# Altium PCB CROSS-FPGA_OBNINSK.PcbDoc
Units mm, origin at the board's own origin, x right, y up, seen from the top; angles counter-clockwise.
Board outline 71.12 x 31.75 mm, 2 copper layers (Top Layer, Top, Bottom Layer, Bottom); 1 components, 31 nets, 116 pads, 15 vias.
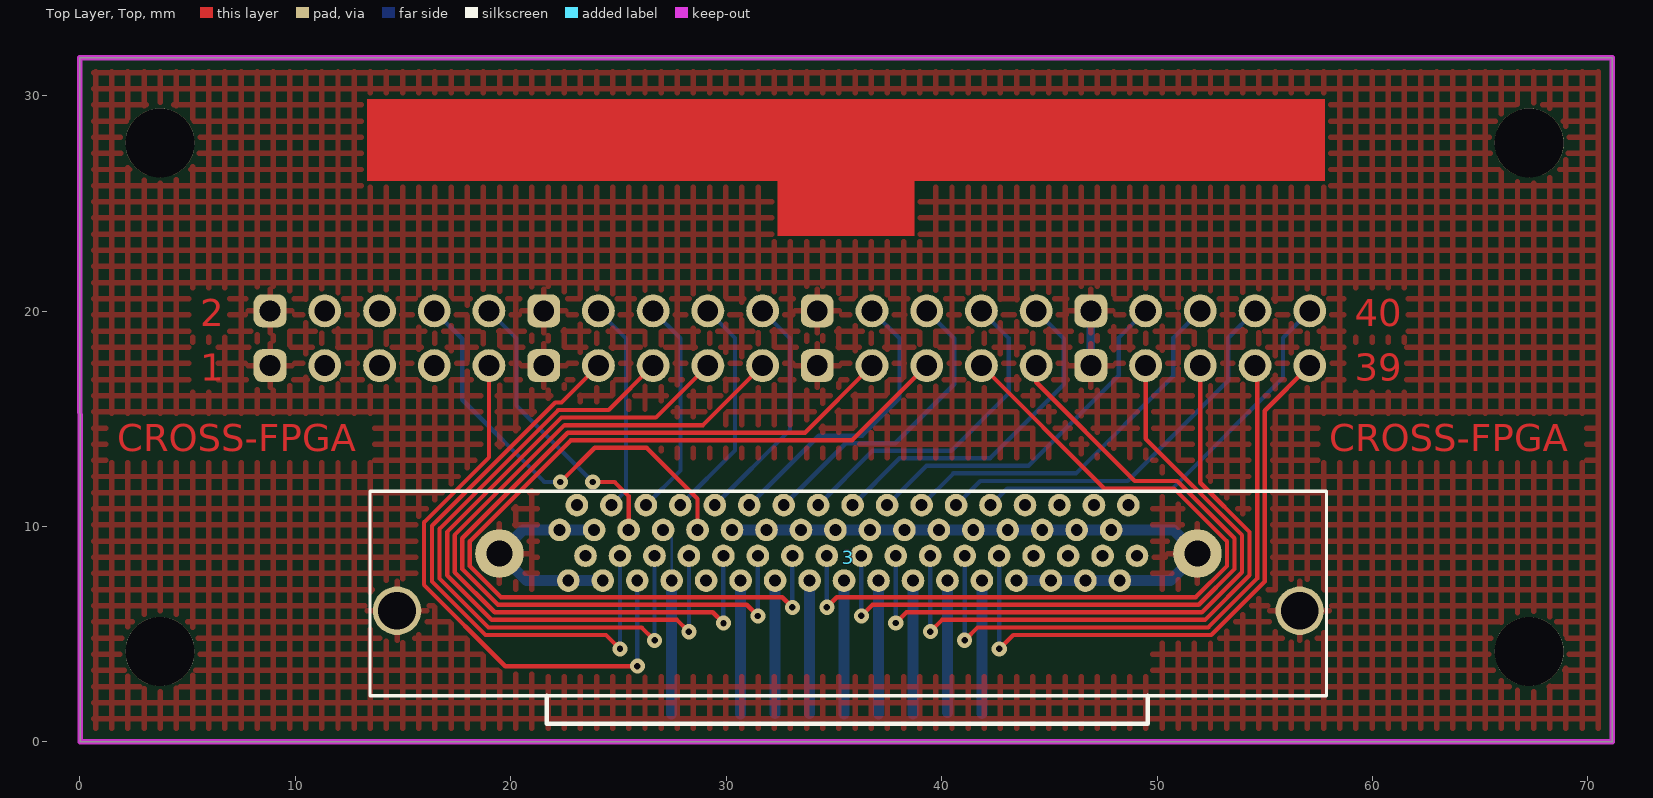
[diagram p0: Top Layer, Top view]
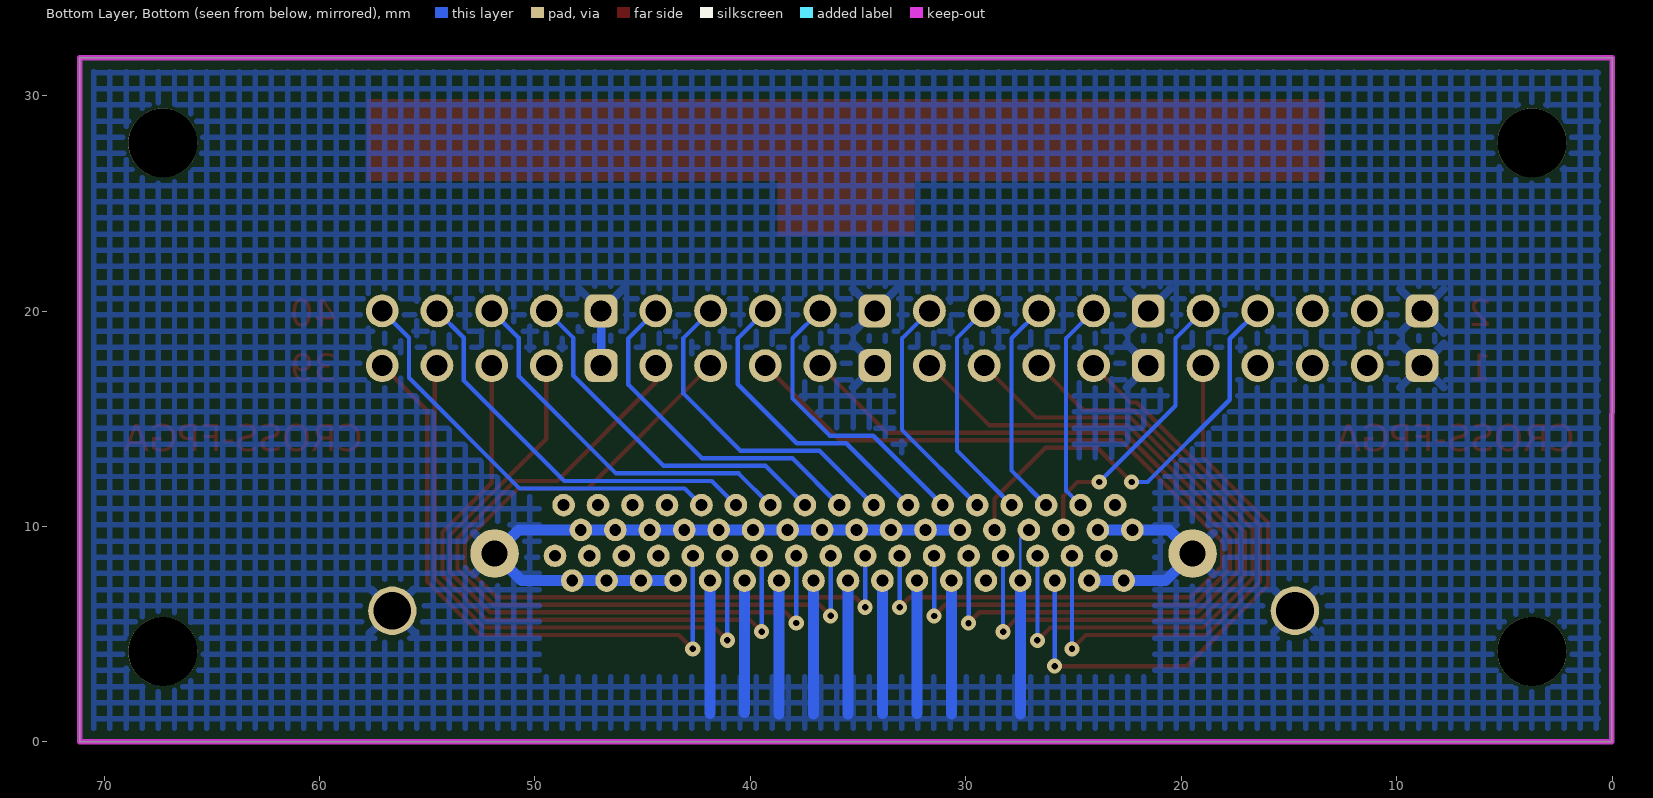
[diagram p1: Bottom Layer, Bottom view, seen from below]

## Layer stack, top to bottom
Top Solder, Top Mask: solder mask 0.0102, Solder Resist, Dk 3.5
Top Layer, Top: signal copper 0.0356
Dielectric 1: dielectric 0.32, FR-4, Dk 4.8
Bottom Layer, Bottom: signal copper 0.0356
Bottom Solder, Bot Mask: solder mask 0.0102, Solder Resist, Dk 3.5

## Board outline
0.005,0 0,30.48 0,31.75 71.12,31.75 71.12,0

## Design rules (kind name [scope] priority, off if disabled: settings)
Clearance "Clearance_Top Layer, Top_PadToPad" [ExistsOnLayer('Top Layer, Top') And IsPad vs ExistsOnLayer('Top Layer, Top') And IsPad] p1: gap=0.15
Clearance "Clearance_Top Layer, Top_PadToLine" [ExistsOnLayer('Top Layer, Top') And IsPad vs ExistsOnLayer('Top Layer, Top') And IsWire] p2: gap=0.15
Clearance "Clearance_Top Layer, Top_LineToLine" [ExistsOnLayer('Top Layer, Top') And IsWire vs ExistsOnLayer('Top Layer, Top') And IsWire] p3: gap=0.15
Clearance "Clearance_Top Layer, Top_ViaToPad" [ExistsOnLayer('Top Layer, Top') And IsVia vs ExistsOnLayer('Top Layer, Top') And IsPad] p4: gap=0.15
Clearance "Clearance_Top Layer, Top_ViaToLine" [ExistsOnLayer('Top Layer, Top') And IsVia vs ExistsOnLayer('Top Layer, Top') And IsWire] p5: gap=0.15
Clearance "Clearance_Top Layer, Top_ViaToVia" [ExistsOnLayer('Top Layer, Top') And IsVia vs ExistsOnLayer('Top Layer, Top') And IsVia] p6: gap=0.15
Clearance "Clearance_Bottom Layer, Bottom_PadToPad" [ExistsOnLayer('Bottom Layer, Bottom') And IsPad vs ExistsOnLayer('Bottom Layer, Bottom') And IsPad] p7: gap=0.15
Clearance "Clearance_Bottom Layer, Bottom_PadToLine" [ExistsOnLayer('Bottom Layer, Bottom') And IsPad vs ExistsOnLayer('Bottom Layer, Bottom') And IsWire] p8: gap=0.15
Clearance "Clearance_Bottom Layer, Bottom_LineToLine" [ExistsOnLayer('Bottom Layer, Bottom') And IsWire vs ExistsOnLayer('Bottom Layer, Bottom') And IsWire] p9: gap=0.15
Clearance "Clearance_Bottom Layer, Bottom_ViaToPad" [ExistsOnLayer('Bottom Layer, Bottom') And IsVia vs ExistsOnLayer('Bottom Layer, Bottom') And IsPad] p10: gap=0.15
Clearance "Clearance_Bottom Layer, Bottom_ViaToLine" [ExistsOnLayer('Bottom Layer, Bottom') And IsVia vs ExistsOnLayer('Bottom Layer, Bottom') And IsWire] p11: gap=0.15
Clearance "Clearance_Bottom Layer, Bottom_ViaToVia" [ExistsOnLayer('Bottom Layer, Bottom') And IsVia vs ExistsOnLayer('Bottom Layer, Bottom') And IsVia] p12: gap=0.15
Clearance Clearance_Design_HoleToHole [(IsVia Or IsThruPin) vs (IsVia Or IsThruPin)] p13: gap=0.33
Clearance [All] p14: gap=0.15
PlaneClearance [All] p1: clearance=0.254
PolygonConnect PolygonConnect_2 [IsPolygon And InNet('GND') And OnLayer('Bottom Layer, Bottom') vs IsVia] p1: connectstyle=Relief reliefconductorwidth=0.381 reliefentries=4 polygonreliefangle="45 Angle" airgapwidth=0.254
PolygonConnect PolygonConnect_1 [IsPolygon And InNet('GND') And OnLayer('Bottom Layer, Bottom') vs IsPad] p2: connectstyle=Relief reliefconductorwidth=0.381 reliefentries=4 polygonreliefangle="45 Angle" airgapwidth=0.254
PolygonConnect [All] p3: connectstyle=Relief reliefconductorwidth=0.254 reliefentries=4 polygonreliefangle="90 Angle" airgapwidth=0.254
RoutingVias [All] p1: holewidth=0.711 width=1.27 viastyle="Through Hole" minholewidth=0.711 minwidth=1.27 maxholewidth=0.711 maxwidth=1.27
SolderMaskExpansion [All] p1: expansion=0.102
Width [All] p1: maxlimit=1 minlimit=0.127 preferedwidth=0.254 minimp=50.000000 maximp=50.000000 favimp=50.000000
28 further rules are at their usual default settings.

## Components (designator, comment, footprint, x,y, rotation, side; value= is the part's Value field where it differs from the comment)
3 "" "VHDCI 68" 48.669,10.99 r0 top

## Footprints (in the part's own frame and the unit in brackets; to place one, negate y for a bottom-side part, rotate by r counter-clockwise, add the part's x,y. Pads: shape width x height; smd on the part's side, far side on the other; paste and mask are expansions set on the pad)
"VHDCI 68" [mm]
  round 1.05 hole 0.55: 1(0,0) 2(-0.8,-1.15) 3(-1.6,0) 4(-2.4,-1.15) 5(-3.2,0) 6(-4,-1.15) 7(-4.8,0) 8(-5.6,-1.15) 9(-6.4,0) 10(-7.2,-1.15) 11(-8,0) 12(-8.8,-1.15) 13(-9.6,0) 14(-10.4,-1.15) 15(-11.2,0) 16(-12,-1.15) 17(-12.8,0) 18(-13.6,-1.15) 19(-14.4,0) 20(-15.2,-1.15) 21(-16,0) 22(-16.8,-1.15) 23(-17.6,0) 24(-18.4,-1.15) 25(-19.2,0) 26(-20,-1.15) 27(-20.8,0) 28(-21.6,-1.15) 29(-22.4,0) 30(-23.2,-1.15) 31(-24,0) 32(-24.8,-1.15) 33(-25.6,0) 34(-26.4,-1.15) 35(0.4,-2.35) 36(-0.4,-3.5) 37(-1.2,-2.35) 38(-2,-3.5) 39(-2.8,-2.35) 40(-3.6,-3.5) 41(-4.4,-2.35) 42(-5.2,-3.5) 43(-6,-2.35) 44(-6.8,-3.5) 45(-7.6,-2.35) 46(-8.4,-3.5) 47(-9.2,-2.35) 48(-10,-3.5) 49(-10.8,-2.35) 50(-11.6,-3.5) 51(-12.4,-2.35) 52(-13.2,-3.5) 53(-14,-2.35) 54(-14.8,-3.5) 55(-15.6,-2.35) 56(-16.4,-3.5) 57(-17.2,-2.35) 58(-18,-3.5) 59(-18.8,-2.35) 60(-19.6,-3.5) 61(-20.4,-2.35) 62(-21.2,-3.5) 63(-22,-2.35) 64(-22.8,-3.5) 65(-23.6,-2.35) 66(-24.4,-3.5) 67(-25.2,-2.35) 68(-26,-3.5)
  round 2.25 hole 1.2: 69(3.2,-2.25) 71(-29.2,-2.25)
  round 2.25 hole 1.75: 70(7.95,-4.9) 72(-33.95,-4.9)
  silkscreen extent -35.2,-10.15 9.2,0.65

## Free pads (board coordinates)
  round 3.2 hole 3.2 unplated: 0(3.719,4.2) 0(3.719,27.805) 0(67.269,4.2) 0(67.269,27.805)
  rrect50% 1.524x1.524 hole 0.965: 0(8.827,17.468) 0(8.827,20.008) 0(21.527,17.468) 0(21.527,20.008) 0(34.227,17.468) 0(34.227,20.008) 0(46.927,17.468) 0(46.927,20.008)
  round 1.524 hole 0.965: 0(11.367,17.468) 0(11.367,20.008) 0(13.907,17.468) 0(13.907,20.008) 0(16.447,17.468) 0(16.447,20.008) 0(18.987,17.468) 0(18.987,20.008) 0(24.067,17.468) 0(24.067,20.008) 0(26.607,17.468) 0(26.607,20.008) 0(29.147,17.468) 0(29.147,20.008) 0(31.687,17.468) 0(31.687,20.008) 0(36.767,17.468) 0(36.767,20.008) 0(39.307,17.468) 0(39.307,20.008) 0(41.847,17.468) 0(41.847,20.008) 0(44.387,17.468) 0(44.387,20.008) 0(49.467,17.468) 0(49.467,20.008) 0(52.007,17.468) 0(52.007,20.008) 0(54.547,17.468) 0(54.547,20.008) 0(57.087,17.468) 0(57.087,20.008)

## Via types
v1: diameter 0.7, hole 0.3, Top Layer, Top to Bottom Layer, Bottom, 15 vias

## Nets (pads, with @x,y where several pads share a name; then routed paths per layer and width w, separated by ;. In a path a pad name is that pad's centre, name@x,y a point inside that pad or via, vN(x,y) a via of type N, cw(c..) or ccw(c..) an arc to the next point about the centre after c; other vN are vias at no path point)
GND: 3.2 3.4 3.6 3.8 3.10 3.12 3.14 3.16 3.18 3.20 3.22 3.24 3.28 3.32 3.34 3.36 3.38 3.40 3.42 3.44 3.46 3.48 3.50 3.52 3.54 3.56 3.58 3.62 3.66 3.68 3.69 3.70 3.71 3.72 pad.0@8.827,17.468 pad.0@8.827,20.008 pad.0@21.527,17.468 pad.0@21.527,20.008 pad.0@34.227,17.468 pad.0@34.227,20.008 pad.0@46.927,17.468 pad.0@46.927,20.008 | length 101.8
  Bottom Layer, Bottom w0.127: 3.28 27.469,9.44 3.62
  Bottom Layer, Bottom w0.4: pad.0@46.927,17.468 pad.0@46.927,20.008
  Bottom Layer, Bottom w0.508: 3.32 3.34 20.569,9.84 3.71 20.719,7.49 3.68 3.66 ; 27.469,1.293 3.62 ; 3.24 3.22 3.20 3.18 3.16 3.14 3.12 3.10 3.8 3.6 3.4 3.2 50.769,9.84 3.69 50.619,7.49 3.36 3.38 3.40 3.42 ; 30.669,1.293 3.58 ; 32.269,1.318 3.56 ; 33.869,1.318 3.54 ; 35.469,1.293 3.52 ; 37.069,1.293 3.50 ; 38.669,1.293 3.48 ; 40.269,1.369 3.46 ; 41.869,1.318 3.44
NET00000: pad.0@16.447,17.468
NET00001: pad.0@13.907,17.468
NET00002: pad.0@13.907,20.008
P0.0: 3.65 pad.0@24.067,17.468 | length 28
  Top Layer, Top w0.2: pad.0@23.777,17.468 24.067,17.468 22.354,15.755 22.064,15.755 16.344,10.035 16.344,7.445 18.824,4.965 24.419,4.965 v1(25.069,4.315)
  Bottom Layer, Bottom w0.2: v1(25.069,4.315) 3.65
P0.1: 3.31 pad.0@24.067,20.008 | length 9.8
  Bottom Layer, Bottom w0.2: pad.0@24.067,20.008 25.344,18.731 25.344,11.665 3.31
P0.2: 3.63 pad.0@26.607,17.468 | length 30.7
  Top Layer, Top w0.2: pad.0@26.607,17.468 24.544,15.405 22.209,15.405 16.694,9.89 16.694,7.59 18.969,5.315 26.074,5.315 v1(26.674,4.715)
  Bottom Layer, Bottom w0.2: 26.669,5.12 26.669,5.39 ; 3.63 26.669,5.39 ; v1(26.674,4.715) 26.674,5.385 26.669,5.39
P0.3: 3.29 pad.0@26.607,20.008 | length 10.2
  Bottom Layer, Bottom w0.2: 3.29 27.874,12.595 27.874,18.741 pad.0@26.607,20.008
P0.4: 3.61 pad.0@29.147,17.468 | length 33.1
  Top Layer, Top w0.2: v1(28.269,5.115) 27.719,5.665 19.114,5.665 17.044,7.735 17.044,9.745 22.354,15.055 26.734,15.055 pad.0@29.147,17.468
  Bottom Layer, Bottom w0.2: v1(28.269,5.115) 3.61
P0.5: 3.27 pad.0@29.147,20.008 | length 10.6
  Bottom Layer, Bottom w0.2: 3.27 30.404,13.525 30.404,18.751 pad.0@29.147,20.008
P0.6: 3.59 pad.0@31.687,17.468 | length 36.4
  Top Layer, Top w0.2: v1(29.874,5.515) 29.374,6.015 19.259,6.015 17.394,7.88 17.394,9.6 22.499,14.705 28.924,14.705 pad.0@31.687,17.468
  Bottom Layer, Bottom w0.2: 3.59 29.869,6.09 ; 29.869,6.09 29.874,6.085 v1(29.874,5.515) 29.874,5.715 29.869,5.72 29.869,6.09
P0.7: 3.25 pad.0@31.687,20.008 | length 11
  Bottom Layer, Bottom w0.2: 3.25 32.964,14.485 32.964,18.731 pad.0@31.687,20.008
P1.0: 3.57 pad.0@36.767,17.468 | length 41.2
  Top Layer, Top w0.2: v1(31.469,5.845) 30.949,6.365 19.404,6.365 17.744,8.025 17.744,9.455 22.644,14.355 33.654,14.355 pad.0@36.767,17.468
  Bottom Layer, Bottom w0.2: v1(31.469,5.845) 3.57
P1.1: 3.23 pad.0@36.767,20.008 | length 13.6
  Bottom Layer, Bottom w0.2: 3.23 34.294,14.215 36.309,14.215 38.039,15.945 38.039,18.736 pad.0@36.767,20.008
P1.2: 3.55 pad.0@39.307,17.468 | length 43.9
  Top Layer, Top w0.2: v1(33.074,6.245) 32.604,6.715 19.549,6.715 18.094,8.17 18.094,9.31 22.789,14.005 35.844,14.005 pad.0@39.307,17.468
  Bottom Layer, Bottom w0.2: 3.55 33.069,6.25 v1(33.074,6.245)
P1.3: 3.21 pad.0@39.307,20.008 | length 14.2
  Bottom Layer, Bottom w0.2: 3.21 35.544,13.865 37.844,13.865 40.584,16.605 40.584,18.731 pad.0@39.307,20.008
P1.4: 3.53 pad.0@41.847,17.468 | length 37.7
  Top Layer, Top w0.2: v1(34.669,6.25) 35.134,6.715 51.789,6.715 53.244,8.17 53.244,9.31 50.789,11.765 47.55,11.765 pad.0@41.847,17.468
  Bottom Layer, Bottom w0.2: v1(34.669,6.25) 3.53
P1.5: 3.19 pad.0@41.847,20.008 | length 15.3
  Bottom Layer, Bottom w0.2: 3.19 36.794,13.515 40.454,13.515 43.109,16.17 43.109,18.746 pad.0@41.847,20.008
P1.6: 3.51 pad.0@44.387,17.468 | length 35.4
  Top Layer, Top w0.2: v1(36.274,5.85) 36.789,6.365 51.934,6.365 53.594,8.025 53.594,9.455 50.934,12.115 48.964,12.115 44.387,16.692 pad.0@44.387,17.468
  Bottom Layer, Bottom w0.2: 3.51 36.269,5.955 36.274,5.95 v1(36.274,5.85)
P1.7: 3.17 pad.0@44.387,20.008 | length 16.1
  Bottom Layer, Bottom w0.2: 3.17 38.044,13.165 42.249,13.165 45.669,16.585 45.669,18.726 pad.0@44.387,20.008
P2.0: 3.49 pad.0@49.467,17.468 | length 31.6
  Top Layer, Top w0.2: v1(37.869,5.52) 38.364,6.015 52.079,6.015 53.944,7.88 53.944,9.6 49.467,14.077 pad.0@49.467,17.468
  Bottom Layer, Bottom w0.2: v1(37.869,5.52) 3.49
P2.1: 3.15 pad.0@49.467,20.008 | length 16.8
  Bottom Layer, Bottom w0.2: 3.15 39.294,12.815 44.034,12.815 48.214,16.995 48.214,18.755 pad.0@49.467,20.008
P2.2: 3.47 pad.0@52.007,17.468 | length 30.1
  Top Layer, Top w0.2: v1(39.474,5.12) 40.019,5.665 52.224,5.665 54.294,7.735 54.294,9.745 52.007,12.032 pad.0@52.007,17.468
  Bottom Layer, Bottom w0.2: 3.47 39.469,5.425 39.474,5.42 v1(39.474,5.12)
P2.3: 3.13 pad.0@52.007,20.008 | length 17.7
  Bottom Layer, Bottom w0.2: 3.13 40.544,12.465 46.239,12.465 50.754,16.98 50.754,18.755 pad.0@52.007,20.008
P2.4: 3.45 pad.0@54.547,17.468 | length 28.6
  Top Layer, Top w0.2: v1(41.069,4.72) 41.664,5.315 52.369,5.315 54.644,7.59 54.644,17.371 pad.0@54.547,17.468
  Bottom Layer, Bottom w0.2: v1(41.069,4.72) 3.45
P2.5: 3.11 pad.0@54.547,20.008 | length 18.8
  Bottom Layer, Bottom w0.2: 3.11 41.794,12.115 48.639,12.115 53.299,16.775 53.299,18.76 pad.0@54.547,20.008
P2.6: 3.43 pad.0@57.087,17.468 | length 28.8
  Top Layer, Top w0.2: v1(42.674,4.32) 43.319,4.965 52.514,4.965 54.994,7.445 54.994,15.375 pad.0@57.087,17.468
  Bottom Layer, Bottom w0.2: 3.43 42.669,4.325 v1(42.674,4.32)
P2.7: 3.9 pad.0@57.087,20.008 | length 19.6
  Bottom Layer, Bottom w0.2: 3.9 43.044,11.765 50.709,11.765 55.844,16.9 55.844,18.765 pad.0@57.087,20.008
PFI1: 3.26 pad.0@16.447,20.008 | length 20.3
  Top Layer, Top w0.2: v1(22.304,12.065) 23.894,13.655 26.304,13.655 28.669,11.29 3.26
  Bottom Layer, Bottom w0.2: pad.0@16.447,20.008 17.744,18.711 17.744,15.88 21.559,12.065 v1(22.304,12.065)
PFI2: 3.64 pad.0@18.987,17.468 | length 26.9
  Top Layer, Top w0.2: pad.0@18.987,17.468 18.987,13.208 15.969,10.19 15.969,7.29 19.744,3.515 v1(25.874,3.515)
  Bottom Layer, Bottom w0.2: 3.64 25.869,3.52 v1(25.874,3.515)
PFI3: 3.30 pad.0@18.987,20.008 | length 13.4
  Top Layer, Top w0.2: v1(23.804,12.065) 24.819,12.065 25.469,11.415 3.30
  Bottom Layer, Bottom w0.2: pad.0@18.987,20.008 20.264,18.731 20.264,15.605 v1(23.804,12.065)
pads on no net: 3.1 3.3 3.5 3.7 3.33 3.35 3.37 3.39 3.41 3.60 3.67

## Polygon pours and split planes (outlines as drawn)
GND on Top Layer, Top "Top Layer-No Net" (hatched 90Degree grid 0.75 track 0.254, remove dead copper, pour order 10): 0.635,31.115 0.635,0.635 70.485,0.635 70.485,31.115
GND on Bottom Layer, Bottom "Top Layer-No Net" (hatched 90Degree grid 0.75 track 0.254, remove dead copper, pour order 12): 0.635,31.115 0.635,0.635 70.485,0.635 70.485,31.115

## Keep-outs
Keep-Out Layer, Board:
  the board outline again, w0.254

## Other copper
Top Layer, Top:
  rectangle: 32.385,23.495 38.735,26.035
  rectangle: 13.335,26.035 57.785,29.845
  pour cut-out: 21.224,13.18 21.224,3.02 49.799,3.02 49.799,13.18
  text "2" at 5.588,19.304 h1.25
  text "40" at 59.182,19.304 h1.25
  text "1" at 5.588,16.764 h1.25
  text "39" at 59.182,16.764 h1.25
  text "CROSS-FPGA" at 1.727,13.487 h1.25
  text "CROSS-FPGA" at 57.988,13.487 h1.25
Bottom Layer, Bottom:
  pour cut-out: 21.224,13.18 21.224,3.02 49.799,3.02 49.799,13.18